# EAGLE board Battery_Board_v3.0 (EAGLE 9.6.2)
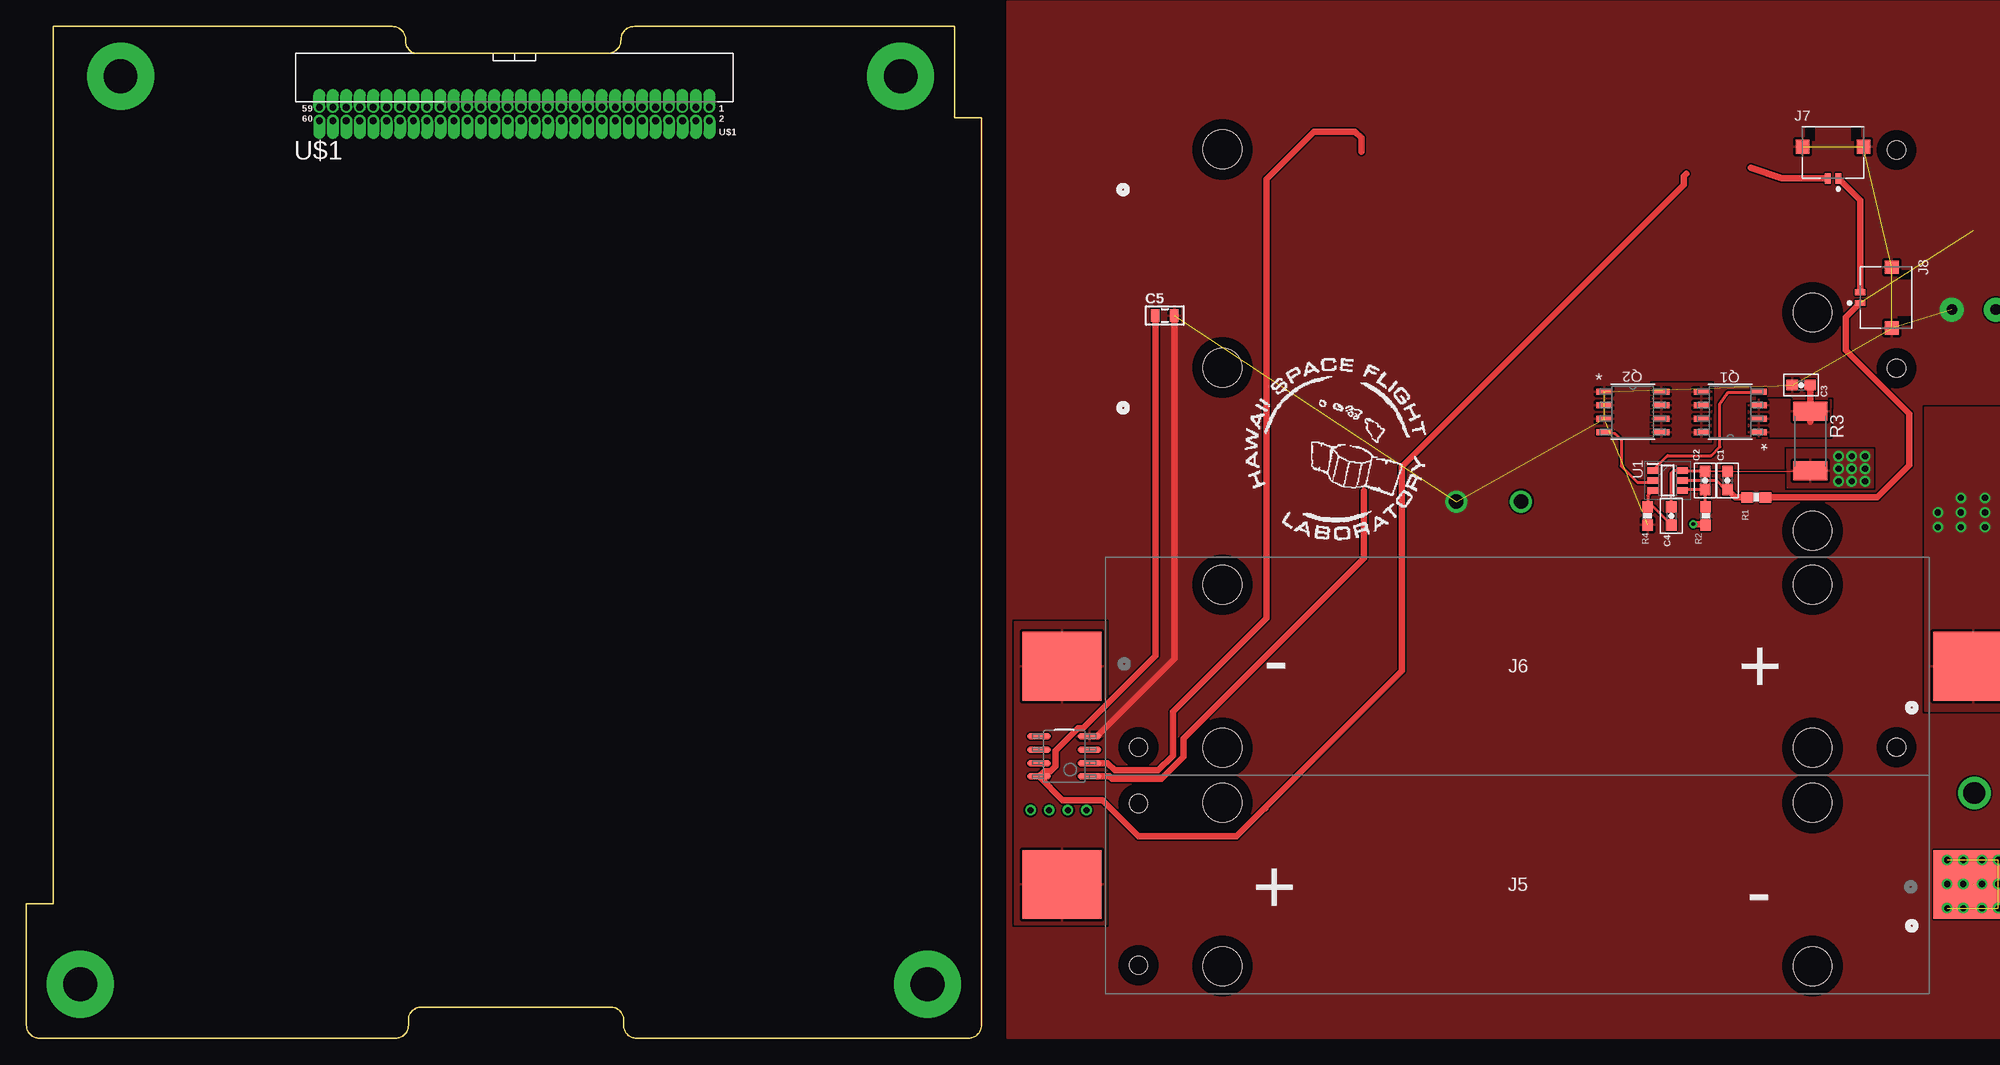
[diagram p0: board, top side]
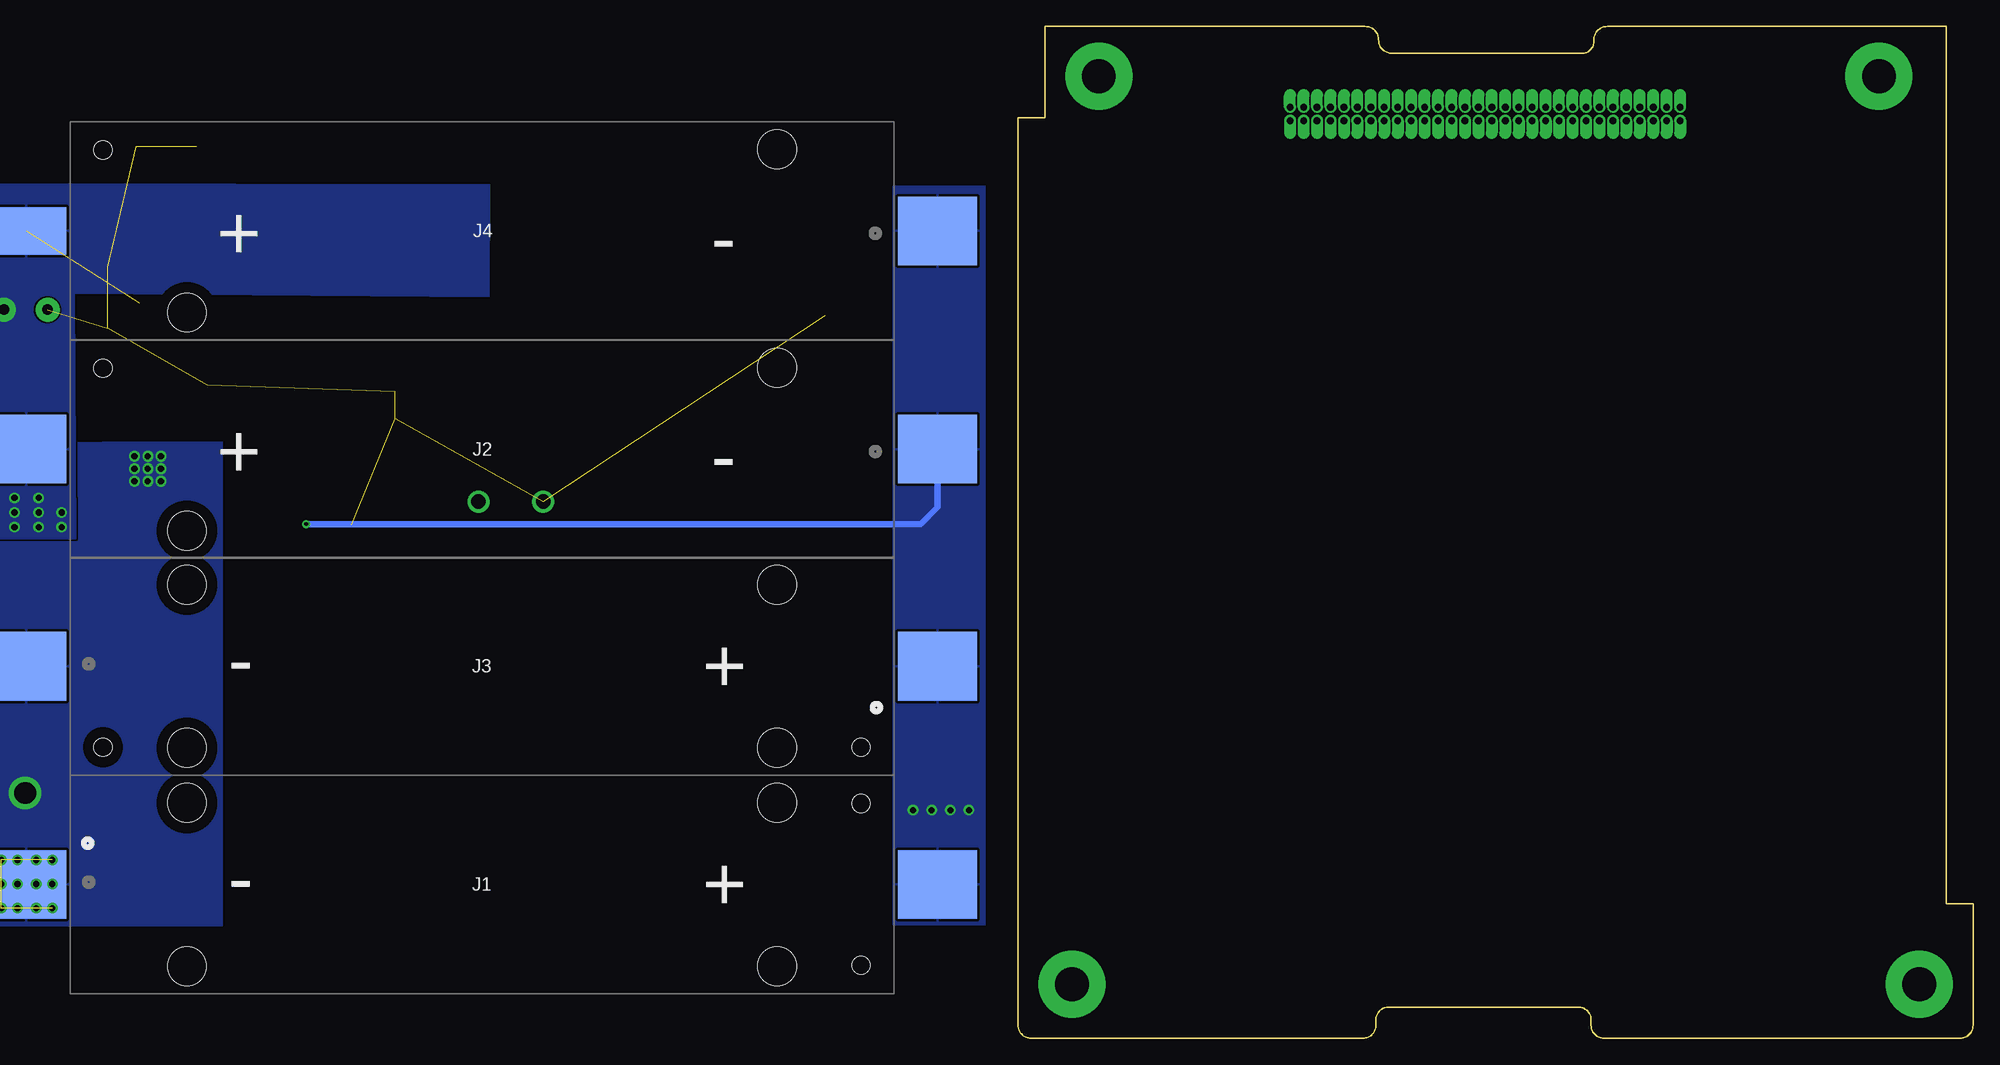
[diagram p1: board, bottom side, seen from below]

Size 90.17 x 95.5 mm. Coordinates in mm from the lower left corner, seen from the top.
Copper layers (1*16): Top 0.035mm / dielectric 1.5mm / Bottom 0.035mm
Design rules "default": minimum track width 6mil, minimum drill 0.35mm, track to track 6mil, track to pad 6mil, pad to pad 6mil, via to via 6mil, smd to smd 6mil, copper to edge 40mil, drill to drill 6mil, minimum pad ring 10mil, minimum via ring 8mil, stop-mask expansion 4mil, vias tented up to drill 0mil, thermal gap 10mil

## Footprints (pad centres in the part's own frame; a part is rotated, then mirrored left to right if it is on the bottom)
0603-CAP = smd 1.1 x 1: 1 -0.85,0; 2 0.85,0
0805 = smd 0.8 x 1.2: 1 -0.9,0; 2 0.9,0
1042_KEY = smd 7.468 x 6.477: 1 -43.02,0; 2 43.02,0 | hole 3.67: -27.865,-7.7; 27.865,7.7 | hole 1.72: 35.785,-7.635
1042_KEY_SMALLPAD = smd 7.468 x 6.477: 1 -43.02,0 | smd 7.468 x 4.5: 2 43.02,0 | hole 3.67: -27.865,-7.7; 27.865,7.7 | hole 1.72: 35.785,-7.635
MOLEX_503763-0291_0 = smd 0.55 x 1: 1 0.5,-2.435; 2 -0.5,-2.435 | smd 1.26 x 1.3: 3 -2.875,0.555; 4 2.875,0.555
SO-8_IRF7458_3P9X4P9_INF = smd 1.499 x 0.559: 1 -2.705,1.905; 2 -2.705,0.635; 3 -2.705,-0.635; 4 -2.705,-1.905; 5 2.705,-1.905; 6 2.705,-0.635; 7 2.705,0.635; 8 2.705,1.905
0603-RES = smd 1.1 x 1: 1 -0.85,0; 2 0.85,0
R2512 = smd 1.8 x 3.2: 1 -2.8,0; 2 2.8,0
SOT95P280X140-6N = smd 1 x 0.6: 1 -1.4,0.95; 2 -1.4,0; 3 -1.4,-0.95; 4 1.4,-0.95; 5 1.4,0; 6 1.4,0.95
D0008A_N = smd 2.2 x 0.6: 1 -2.4,1.905; 2 -2.4,0.635; 3 -2.4,-0.635; 4 -2.4,-1.905; 5 2.4,-1.905; 6 2.4,-0.635; 7 2.4,0.635; 8 2.4,1.905
PC104_WCONN_BACKPLANE_HEADER = drill 0.635 pad 0.965 offset: 1 64.489,87.884; 2 64.489,86.614; 3 63.219,87.884; 4 63.219,86.614; 5 61.949,87.884; 6 61.949,86.614; 7 60.679,87.884; 8 60.679,86.614; 9 59.409,87.884; 10 59.409,86.614; 11 58.139,87.884; 12 58.139,86.614; 13 56.869,87.884; 14 56.869,86.614; 15 55.599,87.884; 16 55.599,86.614; 17 54.329,87.884; 18 54.329,86.614; 19 53.059,87.884; 20 53.059,86.614; 21 51.789,87.884; 22 51.789,86.614; 23 50.519,87.884; 24 50.519,86.614; 25 49.249,87.884; 26 49.249,86.614; 27 47.979,87.884; 28 47.979,86.614; 29 46.709,87.884; 30 46.709,86.614; 31 45.439,87.884; 32 45.439,86.614; 33 44.169,87.884; 34 44.169,86.614; 35 42.899,87.884; 36 42.899,86.614; 37 41.629,87.884; 38 41.629,86.614; 39 40.359,87.884; 40 40.359,86.614; 41 39.089,87.884; 42 39.089,86.614; 43 37.819,87.884; 44 37.819,86.614; 45 36.549,87.884; 46 36.549,86.614; 47 35.279,87.884; 48 35.279,86.614; 49 34.009,87.884; 50 34.009,86.614; 51 32.739,87.884; 52 32.739,86.614; 53 31.469,87.884; 54 31.469,86.614; 55 30.199,87.884; 56 30.199,86.614; 57 28.929,87.884; 58 28.929,86.614; 59 27.659,87.884; 60 27.659,86.614 | drill 3.175 pad 6.35: P$1 5.08,5.08; P$2 85.09,5.08; P$3 82.55,90.805; P$4 8.89,90.805

## Placement (x,y rotation side)
C1  0.1u  [0603-CAP]  160.63,52.64 270 top  (outside the outline)
C2  0.1u  [0603-CAP]  158.52,52.64 270 top  (outside the outline)
C3  0.1u  [0603-CAP]  167.58,61.64 0 top  (outside the outline)
C4  0.1u  [0603-CAP]  155.33,49.3 270 top  (outside the outline)
C5  0.01u  [0805]  107.5,68.22 0 top  (outside the outline)
J1  1042  [1042_KEY]  140.8,14.5 0 bottom  (outside the outline)
J2  1042  [1042_KEY]  140.8,55.6 180 bottom  (outside the outline)
J3  1042  [1042_KEY]  140.8,35.1 0 bottom  (outside the outline)
J4  1042_SMALLPAD  [1042_KEY_SMALLPAD]  140.8,76.2 180 bottom  (outside the outline)
J5  1042  [1042_KEY]  140.8,14.5 180 top  (outside the outline)
J6  1042  [1042_KEY]  140.8,35.1 0 top  (outside the outline)
J7  MOLEX_503763-0291MOLEX_503763-0291_0_0  [MOLEX_503763-0291_0]  170.6,83.6 0 top  (outside the outline)
J8  MOLEX_503763-0291MOLEX_503763-0291_0_0  [MOLEX_503763-0291_0]  175.6,69.9 270 top  (outside the outline)
Q1  IRF7458TRPBF  [SO-8_IRF7458_3P9X4P9_INF]  160.89,59.12 180 top  (outside the outline)
Q2  IRF7458TRPBF  [SO-8_IRF7458_3P9X4P9_INF]  151.69,59.12 0 top  (outside the outline)
R1  330  [0603-RES]  163.35,51.05 180 top  (outside the outline)
R2  330  [0603-RES]  158.57,49.3 90 top  (outside the outline)
R3  0.01  [R2512]  168.46,56.36 270 top  (outside the outline)
R4  1k  [0603-RES]  153.09,49.3 90 top  (outside the outline)
U1  R5460N233AF-TR-FE  [SOT95P280X140-6N]  154.97,52.64 0 top  (outside the outline)
U2  TMP75CID  [D0008A_N]  98,26.6 180 top  (outside the outline)
U$1  V2_BOARD_60PIN  [PC104_WCONN_BACKPLANE_HEADER]  0,0 0 top

## Library data of the parts
C1-C5 R1-R4 = HSFL_Main_Library (1)
J1-J3 J5 J6 = Keystone_Electronics_1042; COPYRIGHT: Copyright (C) 2021 Ultra Librarian. All rights reserved.; DIGI-KEY_PART_NUMBER_1: 1042L-ND; DIGI-KEY_PART_NUMBER_2: 2991-1042-ND; DIGI-KEY_PART_NUMBER_3: 36-1042-ND; DIGI-KEY_PART_NUMBER_4: KEY1066-ND; MANUFACTURER_PART_NUMBER: 1042; MFR_NAME: Keystone Electronics
J4 = Keystone_Electronics_1042
J7 J8 = Molex - 503763-0291; CENTROID_NOT_SPECIFIED: No; DATASHEET: http://www.molex.com/pdm_docs/sd/5037630291_sd.pdf; DIGIKEY_DESCRIPTION: CONN HEADER 1MM R/A 2CKT; DIGIKEY_PART_NUMBER: WM10654CT-ND; LEAD_FREE: yes; MF: Molex; MOUSER_PART_NUMBER: 538-503763-0291; MPN: 503763-0291; PACKAGE: HDR02; PREFIX: J; ROHS: yes; TEMPERATURE_RANGE_HIGH: +105°C; TEMPERATURE_RANGE_LOW: -40°C
Q1 Q2 = IRF7458; COPYRIGHT: Copyright (C) 2021 Ultra Librarian. All rights reserved.; MANUFACTURER_PART_NUMBER: IRF7458TRPBF; MFR_NAME: Infineon
U1 = SamacSys_Parts; DESCRIPTION: Battery Management 2-Cell Li-ion Protection IC; HEIGHT: 1.4mm; MANUFACTURER_NAME: Ricoh; MANUFACTURER_PART_NUMBER: R5460N233AF-TR-FE; MOUSER_PART_NUMBER: 848-R5460N233AFTRFE; MOUSER_PRICE-STOCK: https://www.mouser.co.uk/ProductDetail/Ricoh-Electronic-Devices-Company/R5460N233AF-TR-FE?qs=0lQeLiL1qyZJIzN8jBJcMQ%3D%3D
U2 = TMP75CID; COPYRIGHT: Copyright (C) 2023 Ultra Librarian. All rights reserved.; MANUFACTURER_PART_NUMBER: TMP75CID; MFR_NAME: Texas Instruments; REFDES: RefDes; TYPE: TYPE
U$1 = Artemis v2 board

## Nets
3V3_BUS: C5.1 U2.8
ALERT: U2.3
B-: C1.1 C2.1 C4.1 J1.1 J3.1 J5.1 R3.2 U1.6
BM: J5.2 J6.1
BM+: J1.2 J2.1 J3.2 J4.1 R2.1
I2C1_SCL: U2.2
I2C1_SDA: U2.1
N$2: C3.2 Q1.1 Q1.2 Q1.3 R3.1
N$4: C4.2 R4.2 U1.3
N$5: Q1.5 Q1.6 Q1.7 Q1.8 Q2.5 Q2.6 Q2.7 Q2.8
N$10: U2.5
N$11: U2.6
N$12: U2.7
PACK: J7.2
PACK+: J2.2 J4.2 J6.2 J8.1 R1.1
PACK-: C3.1 C5.2 J7.3 J7.4 J8.3 J8.4 Q2.1 Q2.2 Q2.3 R4.1 U2.4
PACKC: J7.1 J8.2
Q1CONN: Q1.4 U1.1
Q2CONN: Q2.4 U1.2
R2: C2.2 R2.2 U1.4
VDD: C1.2 R1.2 U1.5

## Tracks (layer width: path | path; a pad name or v marks a point on that pad's centre or on a via)
3V3_BUS
  Top 0.61: 156.76,81.6 156.52,81.36 156.52,80.58 129.9,53.95 129.9,49.8 129.9,48.83 129.9,34.7 116.9,21.7 | C5.1 106.6,36.1 99.76,29.26 99.29,29.26 97.16,27.13 97.16,25.65 96.71,25.21 96.11,25.21 U2.8 97.82,22.48 101.59,22.48 105.02,19.04 114.24,19.04 116.9,21.7 | 116.9,21.7 117,21.7
B-  (via drill 0.59 pad 0.38, 2.06 pad 0.99)  (9 unrouted)
  Top 0.152: C2.1 C1.1 167.63,53.49 R3.2
  Top 0.28: C4.1 155.33,53.36 155.56,53.59 U1.6 156.47,53.49 C2.1
  other vias: 186.2,16.82 186.2,14.54 186.2,12.26 184.66,16.82 184.66,14.54 184.66,12.26 182.9,16.82 182.9,14.54 182.9,12.26 181.38,16.82 181.38,12.26 173.63,54.93 173.63,53.75 173.63,52.57 172.36,54.93 172.36,53.75 172.36,52.57 171.12,54.93 171.12,53.75 171.12,52.57 183.95,23.14 181.38,14.54
  pour Top (rank 3): 166.25,55.63 174.42,55.61 174.42,51.95 166.28,51.92
  pour Bottom (rank 3): 165.19,56.28 188.2,56.21 188.2,10.54 165.32,10.59 165.32,56.26
BM
  pour Top: 93.3,10.7 93.3,39.3 102,39.3 102,10.7
BM+  (via drill 0.35 pad 0.6, 0.59 pad 0.38)
  Top 0.6: v157.41,48.53 158.49,48.53 R2.1
  Bottom 0.61: v157.41,48.53 99.37,48.53 97.78,50.12 J2.1
  other vias: 94.82,21.52 96.57,21.52 98.35,21.52 100.1,21.52
  pour Bottom: 93.3,10.7 93.3,80.4 102,80.4 102,10.7
I2C1_SCL
  Top 0.61: 126.04,83.66 126.04,84.98 125.44,85.59 121.59,85.59 117.1,81.1 117.1,39.63 108.28,30.81 108.28,26.68 106.87,25.27 102.8,25.27 102.1,25.96 U2.2
I2C1_SDA
  Top 0.61: 126.28,51.69 126.3,51.67 126.3,45.3 109.24,28.24 109.24,26.56 107.18,24.5 102.48,24.5 102.29,24.7 U2.1
N$2
  Top 0.6: C3.2 168.43,58.19 R3.1
  pour Top (rank 4): 162.62,60.35 170.45,60.27 170.32,57.2 170.32,56.79 162.62,56.76
N$4
  Top 0.28: C4.2 153.63,50.15 R4.2 153.09,51.21 U1.3
N$5
  Top 0.152: Q2.8 154.91,61.02
  pour Top (rank 4): 159.07,56.26 153.48,56.26 153.53,61.84 159.14,61.84 159.09,56.23
N$8  (via drill 1.39 pad 0.67)
  other vias: 141.14,50.65
PACK
  Top 0.61: J7.2 165.74,81.16 162.86,82.14
PACK+  (via drill 0.59 pad 0.38, 1.01 pad 2.27)  (1 unrouted)
  Top 0.6: 164.25,51 R1.1 164.36,51.21
  Top 0.61: 167.35,51.05 167.36,51.06 | 167.36,51.06 174.76,51.06 177.8,54.1 177.8,58.94 171.82,64.91 171.82,68.06 J8.1 | 167.36,51.06 R1.1
  other vias: 185.97,68.77 187.09,51 187.09,49.61 187.09,48.23 184.96,51 184.96,49.61 184.96,48.23 182.67,51 182.67,49.61 182.67,48.23 180.5,49.61 180.5,48.23
  pour Bottom: 188.23,47.16 188.14,47.08 179.18,47.13 179.31,70.3 140.12,69.97 140.09,80.54 188.02,80.64 188.2,47.16
  pour Top (rank 4): 179.25,59.56 188.23,59.56 188.23,30.86 179.25,30.86
PACK-  (via drill 1.01 pad 2.27, 1.39 pad 0.67)  (11 unrouted)
  Top 0.61: C5.2 108.4,35.81 101.1,28.5 U2.4
  other vias: 181.83,68.77 135.02,50.65
  pour Top (rank 6): 92.6,0 92.6,97.9 200.1,97.9 200.1,0
PACKC
  Top 0.61: J7.1 173.17,79.1 J8.2
Q1CONN
  Top 0.28: U1.1 154.97,54.99 159.1,54.99 159.92,55.81 159.92,59.9 160.68,60.96 163.5,60.96 Q1.4
Q2CONN
  Top 0.28: U1.2 153.43,52.5 152.11,52.5 150.61,54 150.61,56.48 150.04,57.05 Q2.4
R2
  Top 0.28: 158.52,50.2 C2.2 156.47,51.79 U1.4
  Top 0.6: R2.2 158.52,50.2
VDD
  Top 0.28: C1.2 160.43,51.79 159.58,52.64 U1.5
  Top 0.6: R1.2 161.37,51.05 C1.2

## Text on the board
_tsilk: PyCubed.org | J10